# Allegro board PCB_DAMIAN.brd
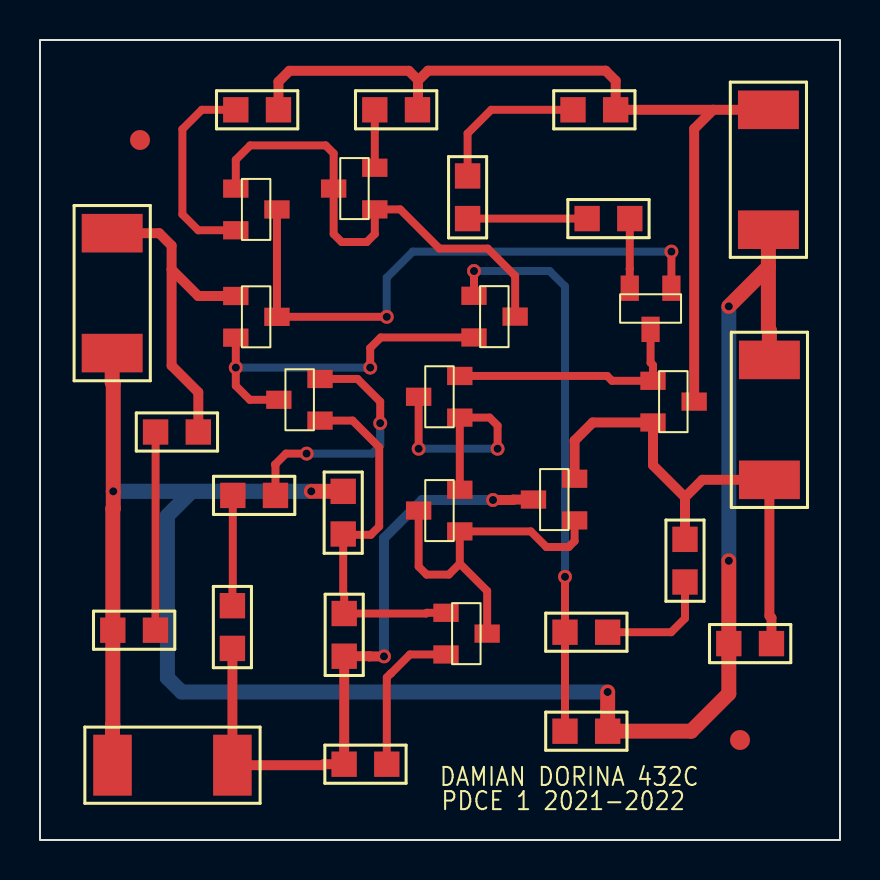
[diagram p0: board, top side]
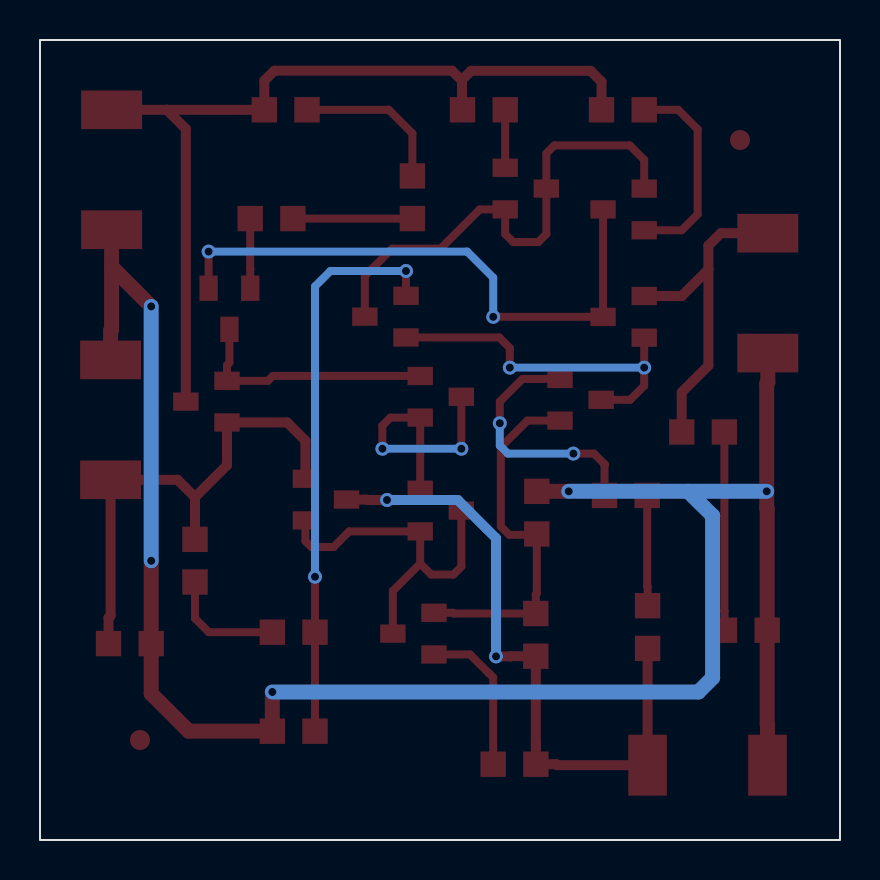
[diagram p1: board, bottom side, seen from below]

Outline 40 x 40 mm; copper layers: TOP, BOTTOM. Coordinates in mm from the lower left corner of the outline.
Outline path: rectangle 0,0 40,40

## Design rules (mm)
nets with their own width: min track width 0.4; nets N00111 N00130 N00146 N00215 N00219 N00394 N00415 N00599 N00938 N00992 N01004 N01164 N01228 N07192 N18430 N27319 N266861 N268611
nets with their own width: min track width 0.5; nets VCC VEE VIN VOUT
nets with their own width: min track width 0.75; nets GND

## Placement (name value [footprint] x y rotation side)
J1  CON2  [SMR2512]  3.61 30.34 270 top
J2  CON2  [SMR2512]  36.47 18.01 90 top
J3  CON2  [SMR2512]  36.42 36.51 270 top
J4  CON2  [SMR2512]  9.62 3.74 180 top
NOREF  -  [unnamed]  35 5 0 top
NOREF#2  -  [unnamed]  5 35 0 top
Q1  QBC846B  [TO236AA]  9.79 27.2 180 top
Q2  QBC846B  [TO236AA]  21.7 27.21 180 top
Q3  QBC856B  [TO236AA]  9.79 32.57 180 top
Q4  QBC856B  [TO236AA]  16.74 31.53 0 top
Q5  QBC856B  [TO236AA]  31.57 27.59 90 top
Q6  QBC856B  [TO236AA]  20.99 21.12 0 top
Q7  QBC856B  [TO236AA]  20.99 15.43 0 top
Q8  QBC846B  [TO236AA]  30.65 22.96 180 top
Q9  QBC856B  [TO236AA]  26.73 15.98 0 top
Q10  QBC846B  [TO236AA]  14 20.97 0 top
Q11  QBC846B  [TO236AA]  20.3 11.36 180 top
R1  100k  [SMR0805]  5.78 20.4 0 top
R2  4.7k  [SMR0805]  3.64 10.49 0 top
R3  51  [SMR0805]  9.79 36.51 0 top
R4  51  [SMR0805]  16.74 36.51 0 top
R5  150  [SMR0805]  26.65 36.51 0 top
R6  100  [SMR0805]  21.38 31.07 90 top
R7  0.47  [SMR0805]  29.49 31.07 180 top
R8  1k  [SMR0805]  15.21 9.19 90 top
R9  1k  [SMR0805]  15.16 15.3 90 top
R10  1k  [SMR0805]  9.64 17.23 0 top
R11  1.5k  [SMR0805]  9.62 9.58 90 top
R12  510  [SMR0805]  17.34 3.79 180 top
R13  1k  [SMR0805]  26.25 5.44 0 top
R14  910  [SMR0805]  26.25 10.39 0 top
R15  5.6k  [SMR0805]  32.25 12.9 90 top
RL  1  [SMR0805]  34.44 9.82 0 top

## Library data of the parts
J1-J4 = CON2
Q1 = QBC846B_0
Q2 Q8 Q10 Q11 = QBC846B_1
Q3 = QBC856B_3
Q4 = QBC856B_4
Q5 = QBC856B_5
Q6 = QBC856B_1
Q7 = QBC856B_0
Q9 = QBC856B_2
R1-R15 RL = R

## Footprints (pads in the part's own frame, mm; a bottom-side part is the same pattern mirrored in y, then rotated)
SMR0805
  rect 1.27x1.27 smd: 1(0,0) 2(2.134,0)
SMR2512
  rect 1.93x3.048 smd: 1(0,0) 2(5.994,0)
TO236AA
  rect 1.27x0.914 smd: 1(0,0) 2(0,2.083) 3(-2.057,1.041)
unnamed
  round 1 smd: (0,0)

## Nets
GND: J1.2 J2.2 J3.2 J4.2 R2.1 R9.2 R13.2 RL.1
VCC: J3.1 Q8.3(C) R3.2 R4.2 R5.2
VEE: J4.1 Q9.3(C) R8.1 R11.1 R12.2
VIN: J1.1 Q1.1(B) R1.2
VOUT: J2.1 Q8.2(E) Q9.2(E) R15.2 RL.2
N00111: Q2.3(C) Q3.1(B) Q4.1(B) Q4.3(C)
N00130: Q1.3(C) Q3.3(C) Q5.1(B)
N00146: Q1.2(E) Q2.2(E) Q10.3(C)
N00215: Q4.2(E) R4.1
N00219: Q3.2(E) R3.1
N00394: Q6.1(B) Q6.3(C) Q7.2(E)
N00415: Q7.1(B) Q7.3(C) Q9.1(B) Q11.3(C)
N00599: Q5.3(C) Q6.2(E) Q8.1(B)
N00938: Q10.1(B) Q11.1(B) R8.2 R9.1
N00992: R10.1 R11.2
N01004: Q11.2(E) R12.1
N01164: Q2.1(B) R13.1 R14.1
N01228: R14.2 R15.1
N07192: Q10.2(E) R10.2
N18430: Q5.2(E) R7.1
N27319: R6.1 R7.2
N266861: R1.1 R2.2
N268611: R5.1 R6.2

## Via types
v1: diameter 0.7, hole 0.4, TOP to BOTTOM, 17 vias

## Routing (per net, layer and track width the routed paths; a pad name or vN(x,y) marks a point on that pad's centre or on a via; arc(x,y) is an arc through that point)
GND: length 101.8
  TOP w0.75: J3.2 36.42,28.66 ; 36.42,28.66 36.42,25.52 36.47,25.47 J2.2 ; 36.42,28.66 v1(34.44,26.68) ; J1.2 3.61,22.88 3.66,22.82 v1(3.66,17.43) 3.66,16.58 3.64,16.56 R2.1 3.64,5.78 3.63,5.77 J4.2 ; R9.2 v1(13.56,17.43) ; v1(28.38,7.4) R13.2 32.56,5.44 34.44,7.32 RL.1 v1(34.44,13.96)
  BOTTOM w0.75: 7.59,17.43 6.37,16.21 6.37,8.11 7.08,7.4 v1(28.38,7.4) ; 7.59,17.43 v1(3.66,17.43) ; 7.59,17.43 v1(13.56,17.43) ; v1(34.44,13.96) v1(34.44,26.68)
VCC: length 44.7
  TOP w0.5: 18.9,37.97 18.9,38 18.44,38.46 12.47,38.46 11.92,37.91 R3.2 ; 18.9,37.97 18.9,36.54 R4.2 ; 18.9,37.97 19.4,38.47 28.28,38.47 28.78,37.97 R5.2 33.66,36.51 ; 33.66,36.51 32.71,35.56 Q8.3 ; 33.66,36.51 J3.1
VEE: length 33
  TOP w0.5: v1(22.65,17) 23.64,17 23.66,17.02 Q9.3 ; v1(17.2,9.18) 16.47,9.18 16.46,9.19 R8.1 15.21,4.81 15.21,4.8 R12.2 14.19,3.79 14.14,3.74 J4.1 R11.1
  BOTTOM w0.5: v1(17.2,9.18) 17.2,15.09 19.11,17 v1(22.65,17)
VIN: length 16.9
  TOP w0.5: 9.82,27.23 Q1.1 7.91,27.2 6.58,28.53 ; 6.58,28.53 6.58,29.72 5.96,30.34 J1.1 ; 6.58,28.53 6.58,23.72 7.91,22.39 R1.2
VOUT: length 25.5
  TOP w0.5: RL.2 36.57,11.11 36.47,11.21 J2.1 33.12,18.01 32.25,17.14 ; Q9.2 26.73,19.97 27.64,20.88 Q8.2 30.65,18.74 32.25,17.14 ; 32.25,17.14 R15.2
N00111: length 24.9
  TOP w0.4: Q3.1 9.79,34.01 10.51,34.73 14.28,34.73 14.68,34.33 Q4.3 14.68,30.3 15.08,29.9 16.34,29.9 16.74,30.3 Q4.1 18.01,31.53 19.97,29.57 22.39,29.57 23.76,28.2 Q2.3
N00130: length 29.4
  TOP w0.4: Q5.1 v1(31.57,29.42) ; v1(17.34,26.16) Q1.3 Q3.3
  BOTTOM w0.4: v1(17.34,26.16) 17.34,28.12 18.64,29.42 v1(31.57,29.42)
N00146: length 18
  TOP w0.4: Q10.3 10.49,22.01 9.79,22.71 v1(9.79,23.62) Q1.2 ; Q2.2 17.04,25.13 16.51,24.6 v1(16.51,23.62)
  BOTTOM w0.4: v1(9.79,23.62) v1(16.51,23.62)
N00215: length 2.9
  TOP w0.4: R4.1 Q4.2
N00219: length 10.3
  TOP w0.4: Q3.2 7.91,30.49 7.12,31.28 7.12,35.54 8.09,36.51 R3.1
N00394: length 13.4
  TOP w0.4: Q7.2 Q6.1 ; Q6.1 20.99,21.2 ; Q6.1 22.48,21.12 22.88,20.72 v1(22.88,19.56) ; Q6.3 v1(18.93,19.56)
  BOTTOM w0.4: v1(18.93,19.56) v1(22.88,19.56)
N00415: length 18.2
  TOP w0.4: Q9.1 26.73,14.94 26.44,14.65 25.32,14.65 24.54,15.43 Q7.1 20.99,13.82 ; 20.99,13.82 22.36,12.45 Q11.3 ; 20.99,13.82 20.44,13.27 19.33,13.27 18.93,13.67 Q7.3
N00599: length 12.4
  TOP w0.4: Q6.2 28.36,23.2 28.6,22.96 Q8.1 30.65,23.74 30.53,23.87 Q5.3
N00938: length 18.6
  TOP w0.4: Q10.1 15.63,20.97 16.96,19.64 16.96,15.68 16.54,15.26 15.2,15.26 R9.1 15.16,12.34 15.21,12.29 R8.2 19.3,11.32 19.34,11.36 Q11.1
N00992: length 5.5
  TOP w0.4: R10.1 9.64,12.7 9.62,12.68 R11.2
N01004: length 7.8
  TOP w0.4: R12.1 17.34,8.13 17.54,8.33 17.55,8.33 18.5,9.28 Q11.2
N01164: length 28.3
  TOP w0.4: Q2.1 v1(21.7,28.45) ; v1(26.25,13.16) R14.1 R13.1
  BOTTOM w0.4: v1(21.7,28.45) 25.48,28.45 26.25,27.68 v1(26.25,13.16)
N01228: length 6
  TOP w0.4: R15.1 32.25,11.08 31.56,10.39 R14.2
N07192: length 12.9
  TOP w0.4: v1(17.01,20.84) 17.01,21.92 15.88,23.05 Q10.2 ; R10.2 11.77,18.75 11.75,18.77 12.3,19.32 v1(13.33,19.32)
  BOTTOM w0.4: v1(17.01,20.84) 17.01,19.72 16.61,19.32 v1(13.33,19.32)
N18430: length 3.5
  TOP w0.4: R7.1 29.49,28.55 29.49,28.55 Q5.2
N27319: length 6
  TOP w0.4: R6.1 R7.2
N266861: length 9.9
  TOP w0.4: R1.1 5.78,11.46 5.77,11.45 R2.2
N268611: length 7.9
  TOP w0.4: R6.2 21.38,35.33 22.56,36.51 R5.1

## Text on the board
Ref Des/Silkscreen Top: DAMIAN DORINA 432C | PDCE 1 2021-2022
XSECTION_CHART: *  SURFACE - AIR 0 MM | L1: TOP CONDUCTOR - COPPER 0.018 MM | *  DIELECTRIC - FR-4 1.464 MM | L2: BOTTOM CONDUCTOR - COPPER 0.018 MM | DESIGN CROSS SECTION CHART | ___________________________ | TOTAL THICKNESS 1.5 MM | 1-2 | FIGURE | SIZE | 0.4 | DRILL CHART: TOP to BOTTOM | ALL UNITS ARE IN MILLIMETERS | PLATED | QTY | 17
